# Altium PCB PCB1.PcbDoc (part 2 of 2)
Units mm, origin at the board's own origin, x right, y up, seen from the top; angles counter-clockwise.
Board outline 75.27 x 55.69 mm, 4 copper layers (Top Layer, Layer 1, Layer 2, Bottom Layer), stack 0.365 mm thick; 201 components, 124 nets, 644 pads, 413 vias.
Unrouted connection lines stored in the file: 108.
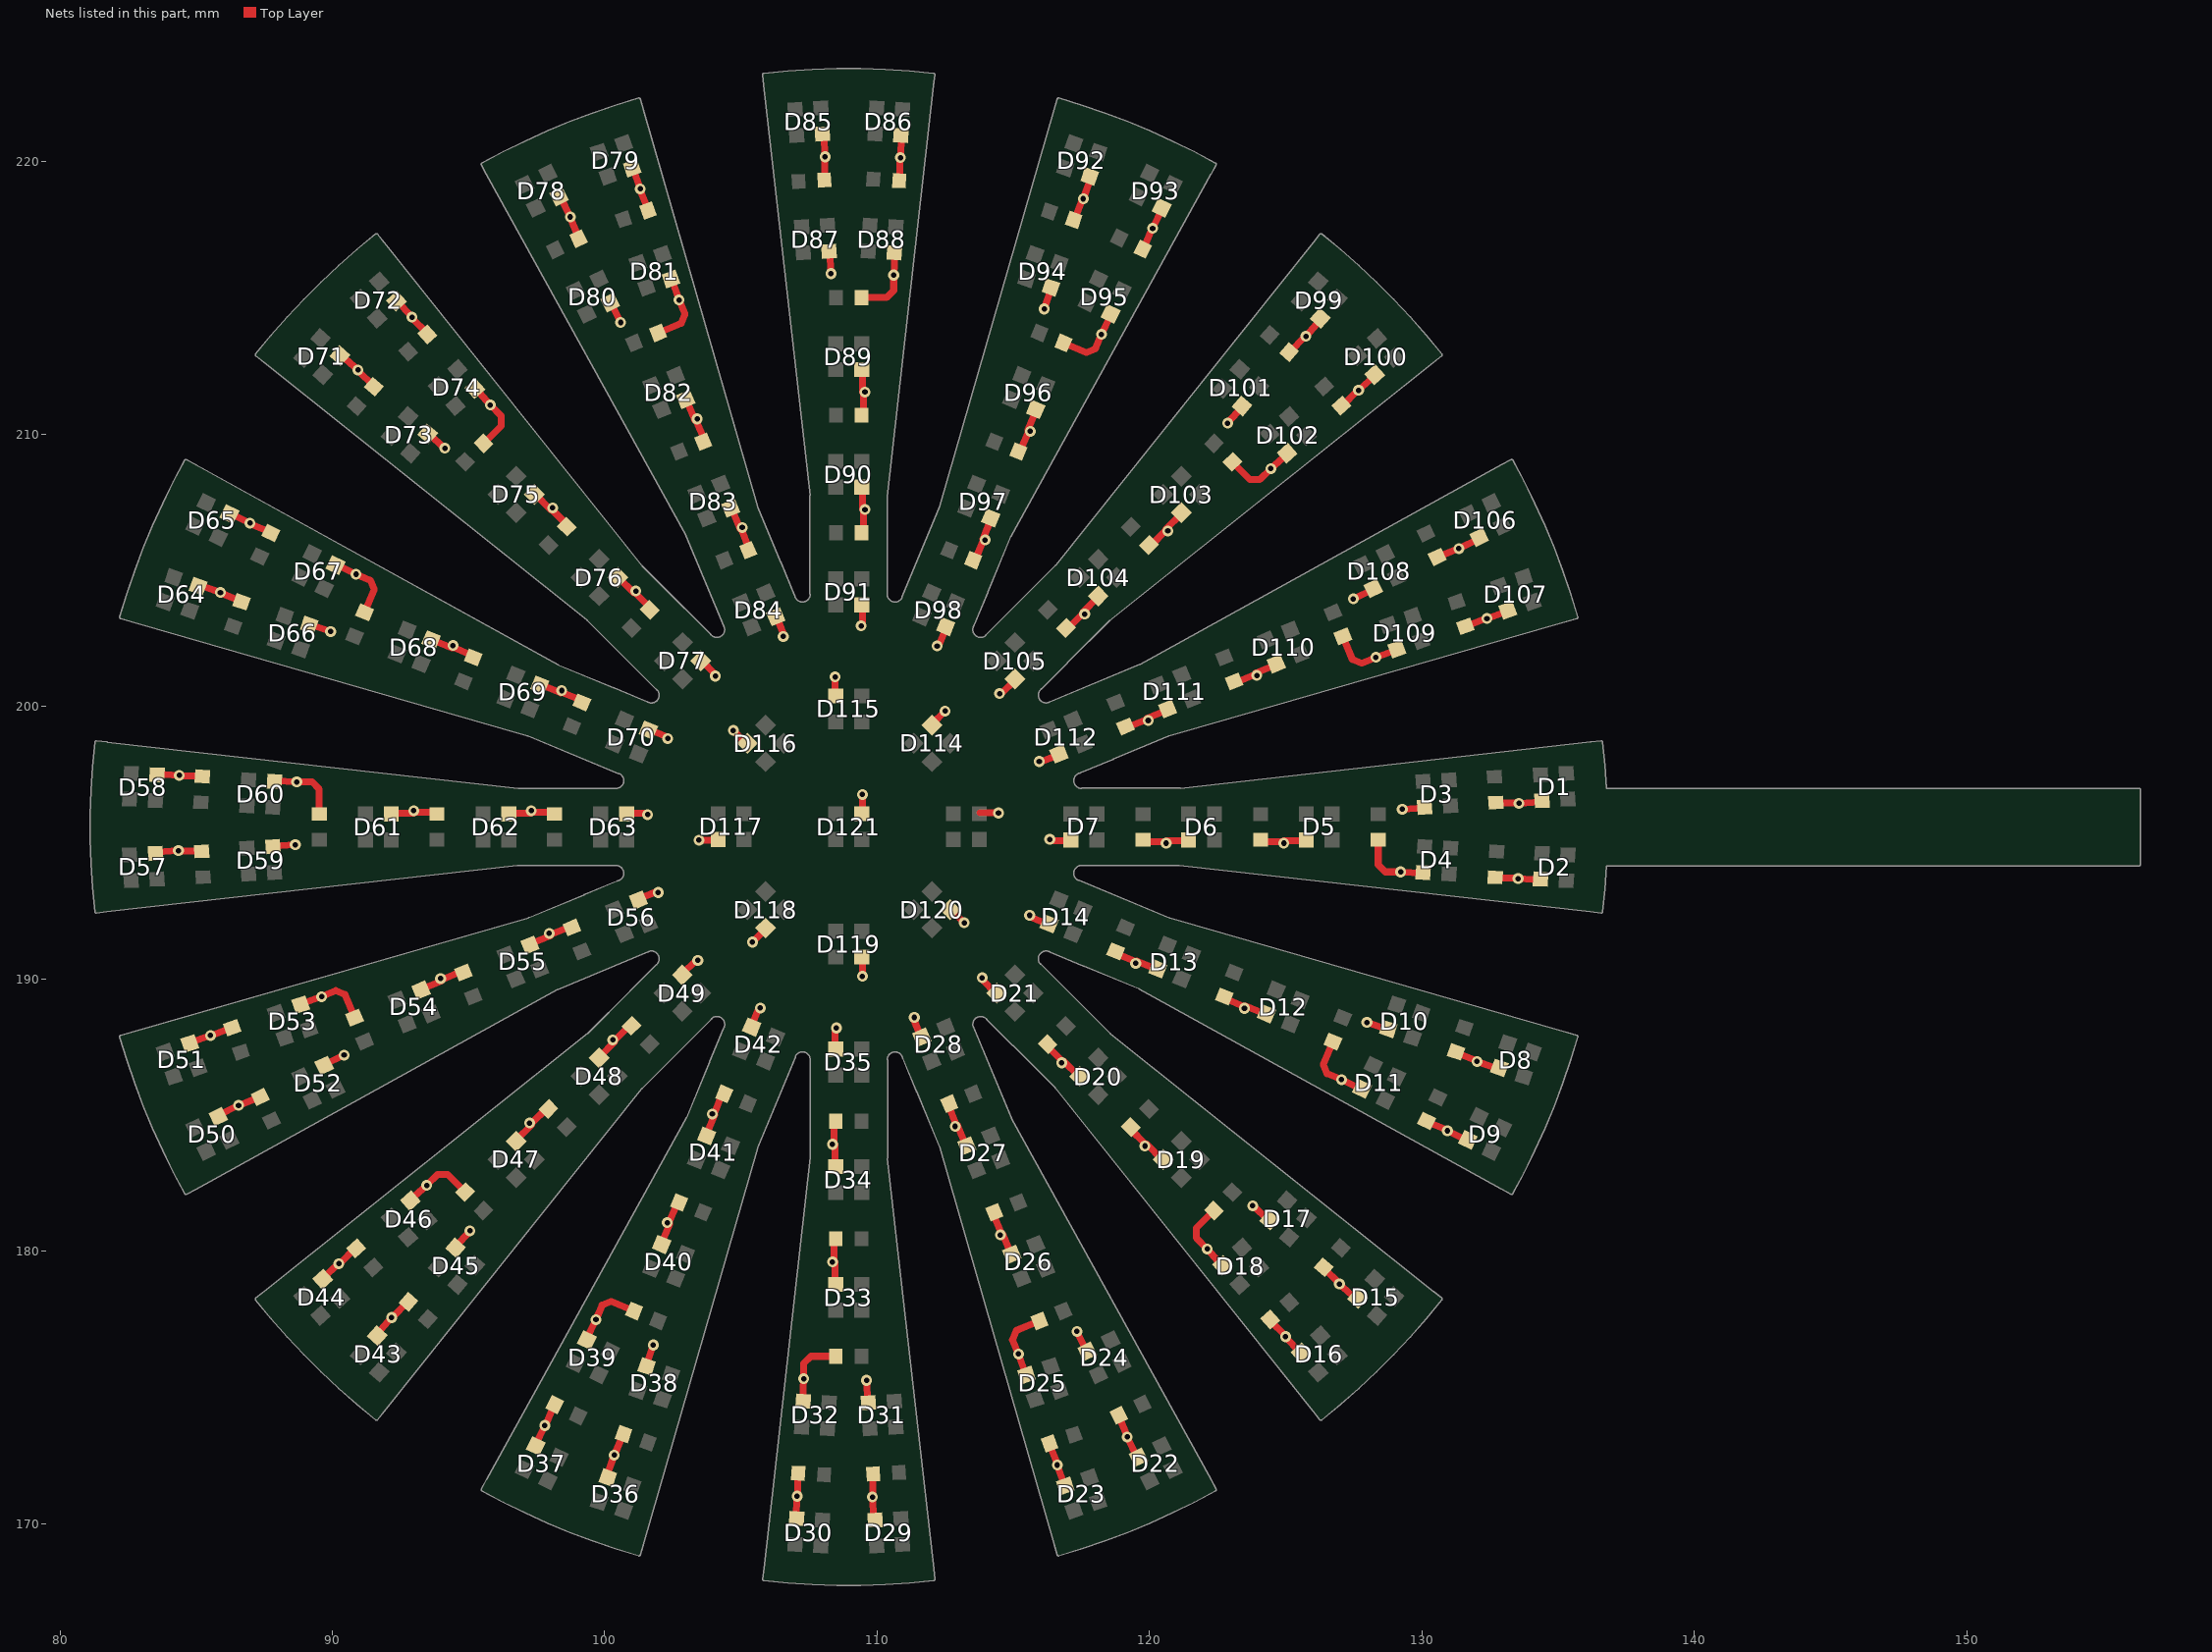
[diagram p4: the nets of this part, all layers, seen from the top]

## Via types
v1: diameter 0.4, hole 0.2, Top Layer to Bottom Layer, tented both sides, 413 vias

## Nets (pads, with @x,y where several pads share a name; then routed paths per layer and width w, separated by ;. In a path a pad name is that pad's centre, name@x,y a point inside that pad or via, vN(x,y) a via of type N, cw(c..) or ccw(c..) an arc to the next point about the centre after c; other vN are vias at no path point) (continued)
Vdd: C1.1 C2.1 C3.1 C4.1 C5.1 C6.1 C7.1 C8.1 C9.1 C10.1 C11.1 C12.1 C13.1 C14.1 C15.1 C16.1 C17.1 C18.1 C19.1 C20.1 C21.1 C22.1 C23.1 C24.1 C25.1 C26.1 C27.1 C28.1 C29.1 C30.1 C31.1 C32.1 C33.1 C34.1 C35.1 C36.1 C37.1 C38.1 C39.1 C40.1 C41.1 C42.1 C43.1 C44.1 C45.1 C46.1 C47.1 C48.1 C49.1 C50.1 C51.1 C52.1 C53.1 C54.1 C55.1 C56.1 C57.1 C58.1 C59.1 C60.1 C61.1 C62.1 C63.1 C64.1 C65.1 C66.1 C67.1 C68.1 C69.1 C70.1 C71.1 C72.1 C73.1 C74.1 C75.1 C76.1 C77.1 C78.1 C79.1 C80.1 D1.4 D2.4 D3.4 D4.4 D5.4 D6.4 D7.4 D8.4 D9.4 D10.4 D11.4 D12.4 D13.4 D14.4 D15.4 D16.4 D17.4 D18.4 D19.4 D20.4 D21.4 D22.4 D23.4 D24.4 D25.4 D26.4 D27.4 D28.4 D29.4 D30.4 D31.4 D32.4 D33.4 D34.4 D35.4 D36.4 D37.4 D38.4 D39.4 D40.4 D41.4 D42.4 D43.4 D44.4 D45.4 D46.4 D47.4 D48.4 D49.4 D50.4 D51.4 D52.4 D53.4 D54.4 D55.4 D56.4 D57.4 D58.4 D59.4 D60.4 D61.4 D62.4 D63.4 D64.4 D65.4 D66.4 D67.4 D68.4 D69.4 D70.4 D71.4 D72.4 D73.4 D74.4 D75.4 D76.4 D77.4 D78.4 D79.4 D80.4 D81.4 D82.4 D83.4 D84.4 D85.4 D86.4 D87.4 D88.4 D89.4 D90.4 D91.4 D92.4 D93.4 D94.4 D95.4 D96.4 D97.4 D98.4 D99.4 D100.4 D101.4 D102.4 D103.4 D104.4 D105.4 D106.4 D107.4 D108.4 D109.4 D110.4 D111.4 D112.4 D114.4 D115.4 D116.4 D117.4 D118.4 D119.4 D120.4 D121.4 | length 183
  Top Layer w0.254: D57.4@83.531,194.639 83.556,194.664 v1(84.352,194.71) 84.365,194.696 85.191,194.696 C45.1@85.203,194.684 ; D58.4@83.588,197.52 v1(84.383,197.475) 84.403,197.455 85.208,197.455 C44.1@85.23,197.433 ; D51.4@84.776,187.664 v1(85.528,187.927) 85.555,187.916 86.298,188.224 C39.1@86.326,188.212 ; D64.4@85.107,204.441 85.139,204.454 v1(85.892,204.192) 85.899,204.174 86.662,203.858 C50.1@86.668,203.842 ; D50.4@85.826,184.981 85.84,185.014 v1(86.557,185.36) 86.575,185.353 87.338,185.669 C40.1@87.354,185.662 ; D65.4@86.261,207.081 v1(86.979,206.735) 86.99,206.708 87.733,206.4 C49.1@87.745,206.372 ; D59.4@87.842,194.884 v1(88.638,194.929) v1@88.615,194.952 ; D60.4@87.899,197.275 v1(88.694,197.23) 89.264,197.23 89.521,196.973 C43.1@89.521,196.056 ; D53.4@88.853,189.088 v1(89.605,189.351) 90.131,189.569 90.467,189.429 C38.1@90.818,188.582 ; D66.4@89.183,203.017 v1(89.935,202.754) v1@89.923,202.784 ; D44.4@89.646,179.014 v1(90.24,179.544) 90.269,179.544 90.838,180.113 C34.1@90.869,180.113 ; D52.4@89.716,186.857 v1(90.433,187.203) v1@90.403,187.216 ; D67.4@90.151,205.205 v1(90.868,204.859) 91.394,204.641 91.533,204.305 C48.1@91.182,203.457 ; D71.4@90.313,212.893 90.348,212.893 v1(90.943,212.363) 90.943,212.343 91.527,211.76 C55.1@91.526,211.742 ; D43.4@91.643,176.936 91.643,176.972 v1(92.173,177.566) 92.193,177.566 92.776,178.15 C35.1@92.794,178.15 ; D61.4@92.189,196.081 v1@92.986,196.081 ; D72.4@92.39,214.89 v1(92.921,214.296) 92.921,214.267 93.49,213.698 C54.1@93.489,213.667 ; D46.4@92.867,181.889 v1(93.462,182.419) 93.864,182.822 94.228,182.822 C33.1@94.877,182.173 ; v1(92.986,196.175) 93.045,196.115 93.779,196.115 C42.1@93.839,196.056 ; D54.4@93.274,189.626 v1@94.01,189.931 ; D73.4@93.534,210.018 v1(94.129,209.487) v1@94.129,209.52 ; D68.4@93.657,202.459 v1@94.393,202.154 ; v1(93.974,190.018) 94.052,189.986 94.73,190.266 C37.1@94.807,190.234 ; v1(94.429,202.241) 94.461,202.163 95.139,201.882 C47.1@95.172,201.805 ; D45.4@94.518,180.158 v1(95.049,180.752) v1@95.016,180.752 ; D74.4@95.265,211.669 v1(95.796,211.074) 96.199,210.672 96.199,210.308 C53.1@95.55,209.659 ; D62.4@96.507,196.081 v1@97.304,196.081 ; D47.4@96.746,184.078 v1@97.309,184.641 ; v1(97.243,184.708) 97.327,184.708 97.846,185.227 C32.1@97.93,185.227 ; D55.4@97.263,191.278 v1@97.999,191.583 ; v1(97.304,196.175) 97.363,196.115 98.097,196.115 C41.1@98.157,196.056 ; D37.4@97.455,172.885 v1(97.801,173.603) 97.828,173.613 98.136,174.357 C29.1@98.164,174.368 ; D75.4@97.454,207.79 v1@98.018,207.227 ; D69.4@97.647,200.806 v1@98.383,200.502 ; v1(97.963,191.67) 98.041,191.638 98.719,191.919 C36.1@98.797,191.887 ; v1(98.084,207.293) 98.084,207.209 98.603,206.69 C52.1@98.603,206.606 ; D78.4@98.358,218.71 98.39,218.696 v1(98.737,217.978) 98.729,217.961 99.045,217.198 C60.1@99.038,217.182 ; v1(98.419,200.588) 98.451,200.511 99.129,200.23 C46.1@99.161,200.152 ; D39.4@99.331,176.774 v1(99.677,177.492) 99.895,178.018 100.231,178.157 C28.1@101.079,177.806 ; D48.4@99.799,187.131 v1@100.363,187.695 ; D36.4@100.095,171.73 100.082,171.763 v1(100.344,172.515) 100.362,172.522 100.678,173.285 C30.1@100.694,173.291 ; D80.4@100.234,214.82 v1(100.58,214.103) v1@100.592,214.133 ; v1(100.296,187.761) 100.38,187.761 100.899,188.28 C31.1@100.983,188.28 ; D76.4@100.508,204.737 v1@101.071,204.173 ; D63.4@100.949,196.132 100.825,196.081 v1@101.528,196.081 ; D79.4@101.041,219.76 v1(101.304,219.008) 101.293,218.981 101.601,218.238 C59.1@101.589,218.209 ; v1(101.137,204.24) 101.137,204.156 101.656,203.637 C51.1@101.656,203.553 ; D56.4@101.348,193.026 101.253,192.931 v1@101.902,193.2 ; D38.4@101.519,175.807 v1(101.782,176.559) v1@101.752,176.546 ; D70.4@101.77,199.154 101.636,199.154 v1@102.285,198.885 ; C58.1@101.958,213.718 102.806,214.069 102.945,214.405 v1(102.727,214.931) D81.4@102.464,215.683 ; D40.4@102.077,180.281 v1@102.382,181.017 ; v1(102.295,181.053) 102.373,181.085 102.654,181.763 C27.1@102.731,181.795 ; D49.4@102.904,190.309 102.853,190.184 v1@103.349,190.681 ; D82.4@103.002,211.262 v1@103.307,210.526 ; v1(103.394,210.562) 103.362,210.484 103.643,209.806 C57.1@103.611,209.728 ; v1(103.458,195.094) D117.4@104.138,195.094 ; D77.4@103.685,201.632 103.561,201.683 v1@104.058,201.186 ; D41.4@103.729,184.27 v1@104.034,185.006 ; v1(103.948,185.042) 104.025,185.074 104.306,185.752 C26.1@104.384,185.785 ; D83.4@104.655,207.273 v1@104.96,206.537 ; v1(104.715,199.128) D116.4@105.196,198.647 ; v1(105.047,206.573) 105.014,206.495 105.295,205.817 C56.1@105.263,205.739 ; D42.4@105.382,188.394 105.382,188.259 v1@105.651,188.909 ; v1(105.422,191.353) D118.4@105.903,191.834 ; D84.4@106.402,203.188 106.307,203.283 v1@106.576,202.634 ; D30.4@107.016,170.211 v1(107.061,171.007) 107.081,171.027 107.081,171.832 C24.1@107.103,171.853 ; D32.4@107.261,174.522 v1(107.306,175.318) 107.306,175.887 107.563,176.144 C23.1@108.48,176.144 ; D85.4@108.016,221.005 108.041,220.98 v1(108.086,220.184) 108.072,220.171 108.072,219.345 C64.1@108.06,219.333 ; D87.4@108.261,216.694 v1(108.306,215.898) v1@108.329,215.921 ; v1(108.361,179.61) 108.421,179.669 108.421,180.403 C22.1@108.48,180.462 ; v1(108.361,183.928) 108.421,183.987 108.421,184.721 C21.1@108.48,184.78 ; D35.4@108.404,187.573 108.455,187.449 v1@108.455,188.152 ; D33.4@108.455,178.813 v1@108.455,179.61 ; D34.4@108.455,183.131 v1@108.455,183.928 ; D115.4@108.456,200.412 v1(108.456,201.092) ; C61.1@109.432,206.379 109.492,206.439 109.492,207.173 v1(109.551,207.232) ; C62.1@109.432,210.697 109.492,210.757 109.492,211.491 v1(109.551,211.55) ; C63.1@109.432,215.015 110.35,215.015 110.607,215.272 v1(110.607,215.842) D88.4@110.652,216.637 ; v1(109.456,190.096) D119.4@109.456,190.776 ; D121.4@109.456,196.094 v1(109.456,196.774) ; v1@109.457,203.008 109.457,203.711 D91.4@109.508,203.587 ; v1@109.457,207.232 D90.4@109.457,208.029 ; v1@109.457,211.55 D89.4@109.457,212.347 ; v1@109.584,175.238 v1(109.607,175.261) D31.4@109.652,174.466 ; C25.1@109.852,171.826 109.84,171.814 109.84,170.989 v1(109.826,170.975) 109.871,170.18 D29.4@109.897,170.155 ; C65.1@110.809,219.306 110.831,219.328 110.831,220.133 v1(110.852,220.153) D86.4@110.897,220.948 ; v1@111.336,188.525 111.605,187.876 D28.4@111.51,187.971 ; D114.4@112.01,199.354 v1(112.49,199.835) ; v1@112.262,202.251 112.53,202.9 D98.4@112.53,202.766 ; C16.1@112.649,185.42 112.617,185.343 112.898,184.665 v1(112.866,184.587) ; D120.4@112.717,192.541 v1(113.197,192.06) ; v1@112.953,184.623 D27.4@113.257,183.887 ; C66.1@113.529,205.375 113.606,205.407 113.887,206.085 v1(113.965,206.117) ; 113.774,196.094 v1(114.454,196.094) ; v1@113.855,189.973 114.352,189.476 D21.4@114.227,189.528 ; v1@113.878,206.153 D97.4@114.183,206.889 ; C17.1@114.302,181.431 114.27,181.353 114.55,180.675 v1(114.518,180.598) ; v1@114.563,200.478 115.06,200.975 D105.4@115.008,200.851 ; v1@114.605,180.634 D26.4@114.91,179.897 ; C67.1@115.181,209.364 115.259,209.397 115.54,210.075 v1(115.617,210.107) ; D25.4@115.448,175.476 v1(115.185,176.229) 114.967,176.755 115.106,177.091 C18.1@115.954,177.442 ; v1@115.53,210.143 D96.4@115.835,210.879 ; v1@115.627,192.274 D14.4@116.277,192.005 ; v1@116.011,197.96 116.66,198.229 D112.4@116.565,198.134 ; v1@116.161,214.613 v1(116.131,214.601) D94.4@116.394,215.353 ; C11.1@116.256,187.607 116.256,187.523 116.775,187.004 v1(116.775,186.92) ; C19.1@116.324,172.95 116.312,172.922 116.62,172.178 v1(116.609,172.152) D23.4@116.872,171.4 ; v1@116.384,195.079 117.087,195.079 D7.4@116.963,195.027 ; C68.1@116.833,213.354 117.681,213.002 118.017,213.142 v1(118.235,213.668) D95.4@118.581,214.385 ; v1@116.841,186.986 D20.4@117.405,186.423 ; C71.1@116.929,202.88 117.013,202.88 117.532,203.399 v1(117.616,203.399) ; C69.1@117.218,217.868 117.234,217.874 117.55,218.637 v1(117.568,218.644) 117.831,219.397 D92.4@117.817,219.429 ; v1@117.32,177.027 v1(117.333,177.057) D24.4@117.679,176.339 ; v1@117.55,203.465 D104.4@118.113,204.028 ; C6.1@118.751,191.007 118.784,190.93 119.462,190.649 v1(119.494,190.571) ; C20.1@118.874,173.977 118.867,173.961 119.183,173.199 v1(119.176,173.181) 119.522,172.463 D22.4@119.555,172.45 ; C76.1@119.116,199.273 119.193,199.241 119.871,199.522 v1(119.949,199.489) ; C12.1@119.309,184.554 119.309,184.47 119.828,183.951 v1(119.828,183.866) ; v1@119.53,190.658 D13.4@120.266,190.353 ; C70.1@119.748,216.791 119.777,216.803 120.084,217.546 v1(120.111,217.557) D93.4@120.457,218.275 ; C1.1@119.756,195.104 119.815,195.044 120.549,195.044 v1(120.608,194.985) ; v1@119.895,183.933 D19.4@120.458,183.37 ; v1@119.913,199.576 D111.4@120.649,199.881 ; C72.1@119.982,205.933 120.066,205.933 120.585,206.452 v1(120.669,206.452) ; v1@120.603,206.518 D103.4@121.166,207.082 ; v1@120.608,195.079 D6.4@121.405,195.079 ; C13.1@122.363,181.5 121.714,180.852 121.714,180.488 v1(122.116,180.085) D18.4@122.647,179.491 ; C7.1@122.741,189.355 122.773,189.277 123.451,188.996 v1(123.483,188.919) ; v1@122.896,210.407 v1(122.864,210.407) D101.4@123.394,211.002 ; C73.1@123.036,208.986 123.684,208.337 124.048,208.337 v1(124.451,208.74) D102.4@125.045,209.271 ; C77.1@123.105,200.925 123.183,200.893 123.861,201.174 v1(123.938,201.142) ; v1@123.519,189.006 D12.4@124.255,188.701 ; v1@123.784,181.64 v1(123.784,181.672) D17.4@124.378,181.142 ; v1@123.902,201.229 D110.4@124.638,201.533 ; C2.1@124.074,195.104 124.133,195.044 124.867,195.044 v1(124.926,194.985) ; C14.1@124.423,177.492 124.423,177.461 124.992,176.892 v1(124.992,176.864) D16.4@125.522,176.269 ; v1@124.926,195.079 D5.4@125.723,195.079 ; C74.1@125.119,213.01 125.136,213.009 125.72,213.593 v1(125.739,213.593) 126.27,214.187 D99.4@126.27,214.223 ; C15.1@126.386,179.417 126.386,179.4 126.97,178.816 v1(126.97,178.797) 127.564,178.266 D15.4@127.599,178.266 ; C8.1@126.73,187.703 126.379,186.855 126.518,186.519 v1(127.044,186.301) D11.4@127.762,185.955 ; C75.1@127.044,211.047 127.075,211.046 127.644,211.615 v1(127.672,211.615) D100.4@128.267,212.146 ; C78.1@127.094,202.578 127.445,201.73 127.781,201.591 v1(128.307,201.809) D109.4@129.06,202.071 ; v1@127.509,203.944 v1(127.479,203.956) D108.4@128.197,204.302 ; v1@127.989,188.375 v1(127.977,188.405) D10.4@128.729,188.142 ; C3.1@128.392,195.104 128.392,194.186 128.649,193.929 v1(129.218,193.929) D4.4@130.014,193.884 ; v1@129.298,196.207 v1(129.275,196.23) D3.4@130.07,196.275 ; C10.1@130.168,184.788 130.179,184.759 130.922,184.451 v1(130.933,184.425) D9.4@131.651,184.079 ; C79.1@130.559,205.498 130.575,205.491 131.337,205.807 v1(131.355,205.799) 132.072,206.146 D106.4@132.086,206.178 ; C9.1@131.245,187.318 131.251,187.302 132.014,186.986 v1(132.021,186.968) 132.773,186.705 D8.4@132.806,186.719 ; C80.1@131.586,202.947 131.614,202.935 132.358,203.243 v1(132.384,203.232) D107.4@133.136,203.495 ; C5.1@132.683,193.727 132.704,193.705 133.509,193.705 v1(133.529,193.684) D2.4@134.325,193.639 ; C4.1@132.71,196.476 132.722,196.463 133.547,196.463 v1(133.561,196.45) 134.356,196.495 D1.4@134.381,196.52
  other v1: 108.502,188.199 111.362,188.587 105.712,188.934 123.478,188.92 113.855,190.04 119.488,190.572 103.416,190.681 115.596,192.337 115.602,192.336 101.963,193.174 116.337,195.126 101.575,196.034 115.949,197.985 102.31,198.824 114.496,200.478 104.058,201.12 112.2,202.225 106.551,202.573 109.41,202.961
pads on no net: D122.4
copper on no net: | length 639.9
  Top Layer w0.254: v1(81.794,197.622) 82.589,197.577 ; 82.533,194.583 82.496,195.231 82.823,195.597 83.06,195.583 83.5,195.976 83.531,196.522 ; v1(83.08,187.072) 83.832,187.335 ; 84.162,204.77 84.377,205.383 84.818,205.597 85.033,205.493 85.589,205.688 85.827,206.18 ; v1(84.643,207.861) 85.361,207.515 ; 84.926,184.547 84.644,185.132 84.805,185.595 85.03,185.673 85.286,186.204 85.106,186.72 ; v1(86.105,197.377) 86.9,197.332 86.695,197.127 ; 86.844,194.827 86.812,195.38 87.016,195.609 87.318,195.626 87.618,195.609 87.814,195.784 87.842,196.277 ; v1(87.157,188.496) 87.909,188.758 87.797,188.49 ; 87.899,193.886 v1(88.694,193.931) ; 88.239,203.347 88.422,203.869 88.698,204.003 88.983,203.903 89.253,203.773 89.502,203.859 89.716,204.304 ; v1(88.305,177.817) 88.9,178.348 ; v1(88.532,205.985) 89.25,205.639 88.981,205.528 ; 88.815,186.423 88.574,186.921 88.675,187.211 88.947,187.342 89.231,187.441 89.345,187.678 89.182,188.144 ; 88.853,202.073 v1(89.606,201.81) ; 89.567,213.559 89.999,214.043 90.489,214.071 90.648,213.894 91.236,213.86 91.644,214.224 ; 90.15,185.956 v1(90.868,186.303) ; 90.312,178.268 90.676,177.86 90.642,177.271 90.465,177.113 90.493,176.623 90.977,176.19 ; v1(90.393,196.081) 91.189,196.081 ; v1(91.194,216.231) 91.724,215.636 ; v1(91.527,180.693) 92.121,181.223 92.121,180.932 ; v1(91.614,188.938) 92.35,189.243 ; v1(91.997,203.146) 92.733,202.842 ; 92.189,195.081 v1(92.986,195.081) ; 92.389,176.271 v1(92.919,176.865) ; 92.788,210.684 93.157,211.097 93.463,211.114 93.688,210.913 93.888,210.689 94.151,210.674 94.519,211.003 ; 92.869,209.272 v1(93.463,208.741) ; 93.275,201.535 v1(94.011,201.23) ; 93.533,181.143 93.862,180.775 93.847,180.512 93.623,180.312 93.422,180.087 93.439,179.781 93.852,179.412 ; 93.657,188.702 v1(94.393,189.007) ; v1(94.069,213.009) 94.6,212.415 94.309,212.415 ; v1(94.711,196.175) 94.758,196.128 95.46,196.128 95.507,196.081 ; 95.264,179.492 v1(95.795,180.086) ; v1(95.567,190.678) 95.629,190.652 96.278,190.921 96.339,190.896 ; v1(96.023,201.581) 96.048,201.519 96.697,201.251 96.723,201.189 ; v1(96.184,209.06) 96.747,208.497 ; 96.507,195.081 97.304,195.081 97.325,195.03 v1(97.304,194.979) ; v1(96.675,171.267) 97.021,171.984 ; 96.747,207.083 v1(97.311,206.519) ; 97.264,199.883 98,199.578 98,199.523 v1(97.961,199.484) ; 97.453,183.371 v1(98.016,183.934) ; 97.646,190.355 98.382,190.659 98.421,190.621 v1(98.421,190.566) ; 97.923,219.61 98.508,219.892 98.971,219.731 99.05,219.506 99.581,219.25 100.097,219.43 ; 98.356,172.451 98.848,172.213 99.043,171.656 98.939,171.442 99.153,171 99.766,170.786 ; v1(98.462,185.927) 98.529,185.927 99.026,186.424 99.092,186.424 ; v1(98.551,175.156) 98.897,175.873 99.008,175.605 ; v1(99.304,206.074) 99.304,206.007 99.801,205.51 99.801,205.444 ; 99.333,214.386 v1(99.679,213.668) ; 99.799,215.721 100.298,215.962 100.587,215.861 100.718,215.589 100.817,215.305 101.054,215.191 101.52,215.353 ; 99.801,204.03 100.364,203.466 100.343,203.416 v1(100.292,203.395) ; 100.232,176.34 100.677,176.125 100.763,175.877 100.633,175.606 100.533,175.321 100.667,175.045 101.189,174.863 ; v1(100.449,221.456) 100.711,220.704 ; 100.825,195.081 v1(101.193,194.192) ; v1(101.253,197.268) 101.253,198.23 ; v1(101.389,178.621) 101.694,179.357 ; v1(101.546,188.955) v1@101.632,188.991 ; v1@101.598,188.965 102.095,189.461 ; 101.635,192.007 v1(102.316,191.327) ; 101.866,216.739 102.135,216.627 v1(101.872,217.379) ; 102.07,189.298 102.143,189.475 ; 102.079,210.879 v1(102.383,210.143) ; v1(102.315,212.922) 102.62,212.186 ; 102.463,175.477 v1(102.726,176.229) ; v1(102.486,200.087) 102.854,200.976 ; v1(102.955,182.646) 103.016,182.672 103.285,183.321 103.347,183.346 ; 103.001,179.898 v1(103.306,180.634) ; 103.56,189.477 v1(104.449,189.109) ; 103.731,206.89 104.036,206.154 103.997,206.115 v1(103.942,206.115) ; v1(104.054,208.969) 104.029,208.907 104.298,208.258 104.272,208.197 ; v1(104.645,186.623) v1@104.712,186.689 ; 104.653,183.887 104.958,184.623 105.013,184.623 v1(105.052,184.585) ; v1@104.69,186.652 104.959,187.301 ; v1(104.703,202.22) 105.383,202.901 ; 104.998,187.141 104.998,187.332 ; 106.306,187.877 v1(107.268,187.877) ; v1(106.914,168.417) 106.959,169.213 ; v1(107.159,172.729) 107.204,173.524 107.409,173.318 ; 107.262,216.637 v1(107.307,215.842) ; v1(107.568,203.342) 108.457,203.711 ; 107.959,222.003 108.607,222.04 108.973,221.713 108.96,221.476 109.353,221.036 109.898,221.005 ; 108.014,170.155 108.56,170.124 108.952,169.684 108.939,169.446 109.305,169.119 109.953,169.156 ; 108.204,217.692 108.757,217.724 108.985,217.52 109.002,217.218 108.985,216.918 109.161,216.722 109.653,216.694 ; 108.259,174.466 108.752,174.438 108.927,174.241 108.91,173.941 108.927,173.64 109.156,173.436 109.709,173.467 ; v1(108.356,207.232) 108.406,207.211 108.457,207.232 108.457,208.029 ; v1(108.361,181.334) 108.408,181.381 108.408,182.084 108.455,182.131 ; v1(108.401,185.655) v1@108.437,185.742 ; v1@108.431,185.699 108.431,186.402 ; v1(108.455,177.016) 108.455,177.813 ; 108.455,186.445 108.529,186.268 ; v1(108.457,211.55) 108.457,212.347 ; 109.455,178.813 v1(109.455,179.61) ; 109.455,183.131 109.455,183.928 109.506,183.948 v1(109.557,183.928) ; 109.455,187.449 v1(110.344,187.817) ; 109.457,209.029 109.504,209.076 109.504,209.778 v1(109.551,209.825) ; 109.457,213.347 v1(109.457,214.143) ; 110.503,217.841 110.709,217.636 v1(110.754,218.431) ; v1(110.605,175.318) 110.65,174.522 ; v1(110.644,203.283) 111.607,203.283 ; v1(110.85,171.007) 110.895,170.211 ; 110.953,221.947 v1(110.999,222.742) ; 112.529,188.259 v1(113.209,188.939) ; v1(112.861,206.575) 112.899,206.536 112.954,206.536 113.259,207.272 ; v1(113.464,202.05) 114.353,201.682 ; 113.64,182.963 113.615,182.901 113.884,182.252 v1(113.858,182.191) ; v1(113.97,185.044) 113.915,185.044 113.876,185.006 114.181,184.269 ; 114.566,207.813 114.627,207.839 114.896,208.488 v1(114.957,208.513) ; v1(114.607,210.525) 114.911,211.261 ; v1(115.187,214.93) 115.449,215.683 ; 115.293,178.974 v1(115.597,178.238) ; v1(115.529,181.016) 115.834,180.28 ; v1(115.597,199.833) 116.277,199.153 ; v1(116.04,173.78) 115.778,174.532 116.046,174.421 ; 116.218,211.803 v1(116.523,212.539) ; 116.392,175.806 116.858,175.969 117.095,175.854 117.194,175.571 117.325,175.299 117.615,175.198 118.113,175.438 ; 116.723,216.297 117.246,216.114 117.379,215.838 117.279,215.553 117.149,215.283 117.236,215.034 117.68,214.82 ; v1(116.771,204.244) 116.792,204.193 116.843,204.172 117.406,204.735 ; 117.201,170.456 v1(117.464,169.704) ; 117.816,171.729 118.332,171.91 118.863,171.654 118.941,171.429 119.404,171.267 119.989,171.549 ; 118.091,195.079 118.268,195.152 ; 118.147,220.374 118.76,220.159 118.973,219.718 118.87,219.503 119.064,218.947 119.556,218.709 ; v1(118.233,177.491) 118.58,176.774 ; 118.82,204.735 118.887,204.735 119.384,205.232 v1(119.45,205.232) ; 118.904,215.555 119.016,215.286 v1(119.362,216.004) ; v1(119.492,200.594) 119.492,200.539 119.53,200.5 120.266,200.805 ; v1(119.896,207.225) 120.459,207.789 ; v1(119.951,191.675) 119.912,191.637 119.912,191.582 120.649,191.277 ; 120.892,219.175 v1(121.238,219.893) ; 121.19,189.97 121.215,189.909 121.864,189.64 v1(121.89,189.579) ; 121.573,200.264 121.634,200.238 122.284,200.507 v1(122.345,200.482) ; 121.873,207.789 v1(122.437,208.352) ; v1(122.118,211.073) 122.648,211.667 ; v1(123.52,202.152) 124.256,202.457 ; v1(123.902,189.929) 124.638,189.625 ; 124.06,211.748 124.473,211.379 124.491,211.073 124.289,210.848 124.065,210.648 124.05,210.385 124.379,210.017 ; 125.179,188.318 v1(125.915,188.013) ; 125.562,201.916 v1(126.298,202.221) ; 125.791,210.227 125.791,209.936 v1(126.385,210.467) ; 126.935,214.969 127.42,214.537 127.448,214.047 127.27,213.888 127.237,213.3 127.601,212.892 ; v1(127.045,204.857) 127.762,205.203 ; 128.196,186.856 128.411,187.3 128.659,187.387 128.93,187.256 129.215,187.157 129.491,187.29 129.673,187.813 ; v1(128.307,189.349) 129.059,189.087 ; 128.73,203.016 128.567,203.482 128.682,203.719 128.965,203.818 129.237,203.949 129.338,204.238 129.098,204.737 ; 128.931,185.632 128.662,185.52 v1(129.38,185.174) ; 129.013,212.812 v1(129.607,213.342) ; 130.115,202.67 130.004,202.401 v1(130.756,202.664) ; 132.085,184.98 132.323,185.472 132.88,185.666 133.094,185.563 133.536,185.776 133.75,186.389 ; 132.552,183.644 v1(133.269,183.298) ; 132.806,204.439 132.626,204.955 132.882,205.486 133.107,205.565 133.269,206.028 132.987,206.613 ; 134.08,203.825 v1(134.832,204.087)
  Layer 2 w0.2: v1@92.906,176.884 92.906,179.632 95.093,181.819 95.62,182.345 96.147,182.872 97.816,184.541 99.459,186.184 101.102,187.828 103.246,189.971 103.846,189.971 ; 109.318,188.004 108.894,187.58 108.894,184.549 108.894,182.225 108.894,179.901 108.894,177.54 108.894,176.796 108.894,176.051 108.894,172.958 v1@110.837,171.015 ; 116.107,193.024 116.336,192.47 119.137,191.31 121.284,190.421 123.431,189.531 125.612,188.628 126.3,188.343 126.988,188.058 129.846,186.874 132.384,187.925
  Layer 2 w0.254: 103.846,189.971 104.857,189.552 105.347,188.369 v1@104.632,186.643 ; 109.318,188.004 110.33,188.423 111.513,187.933 112.228,186.207
  Bottom Layer w0.254: v1(81.794,197.622) 83.255,197.622 86.946,193.931 v1(88.694,193.931) ; v1(83.08,187.072) 84.43,187.631 89.253,185.634 v1(90.868,186.303) ; v1(84.643,207.861) 85.993,207.302 87.991,202.479 v1(89.606,201.81) ; v1(86.105,197.377) 87.312,197.377 90.156,194.534 91.269,194.534 91.816,195.081 v1(92.986,195.081) ; v1(87.157,188.496) 88.272,188.958 91.987,187.419 93.016,187.845 93.312,188.559 v1(94.393,189.007) ; v1(88.305,177.817) 89.339,178.851 94.559,178.851 v1(95.795,180.086) ; v1(88.532,205.985) 89.647,205.523 91.186,201.808 92.215,201.382 92.93,201.678 v1(94.011,201.23) ; v1(90.393,196.081) 90.45,196.081 90.903,195.628 93.263,195.628 95.587,195.628 96.134,195.081 97.304,195.081 97.325,195.03 v1(97.304,194.979) ; v1(91.194,216.231) 92.227,215.197 92.227,209.977 v1(93.463,208.741) ; v1(91.527,180.693) 92.38,181.546 96.402,181.546 97.189,182.333 97.189,183.107 v1(98.016,183.934) ; v1(91.614,188.938) 91.667,188.96 92.259,188.715 94.439,189.618 96.586,190.508 97.301,190.212 98.382,190.659 98.421,190.621 v1(98.421,190.566) ; v1(91.997,203.146) 92.05,203.125 92.295,202.533 94.476,201.629 96.623,200.74 96.919,200.025 98,199.578 98,199.523 v1(97.961,199.484) ; v1(94.069,213.009) 94.922,212.156 94.922,208.134 95.71,207.347 96.483,207.347 v1(97.311,206.519) ; v1(94.711,196.175) 96.53,196.175 97.179,195.526 99.048,195.526 99.524,195.526 100.872,194.968 v1(101.193,194.192) ; v1(95.567,190.678) 97.249,191.374 98.096,191.023 99.823,191.739 100.262,191.921 101.721,191.921 v1(102.316,191.327) ; v1(96.023,201.581) 97.704,200.884 98.055,200.038 99.782,199.322 100.221,199.14 101.253,198.108 v1(101.253,197.268) ; v1(96.184,209.06) 96.224,209.02 96.224,208.379 97.893,206.71 99.537,205.067 99.537,204.293 100.364,203.466 100.343,203.416 v1(100.292,203.395) ; v1(96.675,171.267) 97.234,172.617 102.057,174.614 v1(102.726,176.229) ; v1(98.462,185.927) 99.749,187.214 100.666,187.214 101.988,188.536 102.324,188.872 103.672,189.431 v1(104.449,189.109) ; v1(98.551,175.156) 99.013,176.271 102.728,177.81 103.154,178.839 102.858,179.553 v1(103.306,180.634) ; v1(99.304,206.074) 100.59,204.787 100.59,203.87 101.912,202.548 102.249,202.212 102.807,200.864 v1(102.486,200.087) ; v1(99.679,213.668) 99.01,215.283 101.008,220.106 v1(100.449,221.456) ; v1(101.389,178.621) 101.411,178.674 102.003,178.919 102.907,181.1 103.796,183.247 104.511,183.543 104.958,184.623 105.013,184.623 v1(105.052,184.585) ; v1(101.546,188.955) v1@101.673,188.955 ; v1(101.872,217.379) 102.334,216.264 100.795,212.549 101.221,211.52 101.936,211.224 v1(102.383,210.143) ; v1(102.315,212.922) 102.337,212.869 102.092,212.277 102.995,210.097 103.884,207.95 103.588,207.235 104.036,206.154 103.997,206.115 v1(103.942,206.115) ; v1(102.955,182.646) 103.651,184.327 104.498,184.678 105.214,186.405 105.396,186.845 106.428,187.877 v1(107.268,187.877) ; v1(104.054,208.969) 104.751,207.287 104.4,206.44 105.115,204.713 105.297,204.274 105.297,202.815 v1(104.703,202.22) ; v1(104.645,186.623) v1@104.762,186.672 ; v1(106.914,168.417) 106.914,169.879 110.605,173.57 v1(110.605,175.318) ; v1(107.159,172.729) 107.159,173.936 110.002,176.779 110.002,177.893 109.455,178.44 v1(109.455,179.61) ; v1(107.307,215.842) 107.307,217.59 110.999,221.281 v1(110.999,222.742) ; v1(107.568,203.342) 108.344,203.664 108.903,205.012 108.903,205.488 108.903,207.357 109.551,208.006 v1(109.551,209.825) ; v1(108.356,207.232) 108.406,207.211 108.457,207.232 108.457,208.402 109.004,208.949 109.004,211.273 109.004,213.633 109.457,214.086 v1(109.457,214.143) ; v1(108.361,181.334) 108.361,183.154 109.01,183.802 109.01,185.671 109.01,186.147 109.568,187.496 v1(110.344,187.817) ; v1(108.401,185.655) v1@108.491,185.745 ; v1(108.455,177.016) 108.455,177.073 108.908,177.526 108.908,179.887 108.908,182.211 109.455,182.758 109.455,183.928 109.506,183.948 v1(109.557,183.928) ; v1(108.457,211.55) 108.457,212.72 107.91,213.267 107.91,214.38 110.754,217.224 v1(110.754,218.431) ; v1(110.644,203.283) 111.485,203.283 112.517,204.315 112.699,204.754 113.414,206.481 114.261,206.832 v1(114.957,208.513) ; v1(112.861,206.575) 112.899,206.536 112.954,206.536 113.402,207.617 114.117,207.913 115.006,210.06 115.909,212.241 116.501,212.486 v1(116.523,212.539) ; v1(113.209,188.939) 112.615,188.345 112.615,186.886 112.797,186.446 113.513,184.719 113.162,183.872 v1(113.858,182.191) ; v1(113.464,202.05) 114.24,201.729 115.588,202.287 115.925,202.624 117.246,203.946 118.163,203.946 v1(119.45,205.232) ; v1(113.97,185.044) 113.915,185.044 113.876,185.006 114.324,183.925 114.028,183.21 114.917,181.063 115.821,178.882 115.576,178.29 v1(115.597,178.238) ; v1(114.607,210.525) 115.054,211.606 114.758,212.321 115.184,213.349 118.9,214.889 v1(119.362,216.004) ; v1(115.187,214.93) 115.856,216.545 120.678,218.543 v1(121.238,219.893) ; v1(115.529,181.016) 115.977,179.935 116.691,179.639 117.117,178.611 115.578,174.895 v1(116.04,173.78) ; v1(115.597,199.833) 116.191,199.239 117.65,199.239 118.09,199.421 119.817,200.136 120.664,199.785 v1(122.345,200.482) ; v1(116.771,204.244) 116.792,204.193 116.843,204.172 117.67,204.999 118.443,204.999 120.087,206.643 121.756,208.312 122.396,208.312 v1(122.437,208.352) ; v1(117.464,169.704) 116.905,171.054 118.902,175.876 v1(118.233,177.491) ; v1(119.492,200.594) 119.492,200.539 119.53,200.5 120.611,200.948 121.326,200.652 123.473,201.541 125.654,202.444 126.246,202.199 v1(126.298,202.221) ; v1(119.896,207.225) 120.723,208.053 120.723,208.826 121.51,209.613 125.532,209.613 v1(126.385,210.467) ; v1@119.912,191.582 119.912,191.637 v1(119.951,191.675) ; v1(122.118,211.073) 123.354,212.309 128.574,212.309 v1(129.607,213.342) ; v1(123.52,202.152) 124.601,202.6 124.897,203.315 125.925,203.741 129.641,202.202 v1(130.756,202.664) ; v1@125.862,188.035 v1(125.915,188.013) ; v1(127.045,204.857) 128.66,205.526 133.482,203.528 v1(134.832,204.087) ; v1(128.307,189.349) 129.922,188.68 131.919,183.858 v1(133.269,183.298)

## Polygon pours and split planes (outlines as drawn)
GND on Layer 1 "NONET_L-01_P-001" (solid, remove dead copper, pour order 3): 81.106,167.729 156.591,167.729 156.591,223.774 81.106,223.774
Vdd on Layer 2 "NONET_L-01_P-001" (solid, remove dead copper, pour order 2): 81.106,167.729 156.591,167.729 156.591,223.774 81.106,223.774
Vdd on Bottom Layer "NONET_L-01_P-001" (solid, remove dead copper, pour order 1): 81.106,167.729 156.591,167.729 156.591,223.774 81.106,223.774
GND on Top Layer "NONET_L-01_P-001" (solid, remove dead copper, pour order 0): 81.106,167.729 156.591,167.729 156.591,223.774 81.106,223.774

## Keep-outs
Keep-Out Layer:
  lines w0.01: 156.324,194.151 136.77,194.151 136.759,193.94 136.731,193.517 136.697,193.095 136.656,192.674 136.631,192.458 136.622,192.438 136.605,192.424 136.589,192.419 136.576,192.419 136.174,192.464 121.097,194.162 121.084,194.166 117.589,194.164 117.572,194.16 117.551,194.162 117.538,194.164 117.524,194.166 117.503,194.166 117.455,194.162 117.364,194.131 117.289,194.071 117.238,193.99 117.217,193.896 117.227,193.801 117.269,193.715 117.337,193.647 117.39,193.624 117.41,193.62 120.734,192.244 120.749,192.235 135.32,188.035 135.691,187.929 135.704,187.919 135.714,187.906 135.72,187.882 135.718,187.868 135.501,187.118 134.986,185.644 134.388,184.2 133.71,182.793 133.329,182.104 133.308,182.087 133.295,182.084 133.279,182.084 133.264,182.09 132.909,182.286 119.62,189.633 117.583,190.472 117.566,190.476 116.368,190.973 116.355,190.981 116.331,190.994 116.31,191.004 116.265,191.018 116.169,191.023 116.077,190.997 115.999,190.941 115.944,190.863 115.917,190.771 115.922,190.676 115.959,190.587 116,190.546 116.017,190.534 118.561,187.991 118.571,187.977 130.426,178.521 130.733,178.273 130.741,178.251 130.739,178.233 130.73,178.214 130.243,177.604 129.202,176.439 128.097,175.334 126.933,174.294 126.314,173.8 126.295,173.795 126.275,173.797 126.251,173.815 125.999,174.132 116.54,185.991 116.532,186.005 114.971,187.56 114.957,187.57 114.041,188.487 114.031,188.5 114.014,188.522 114,188.538 113.963,188.569 113.876,188.61 113.781,188.621 113.688,188.599 113.607,188.548 113.547,188.474 113.515,188.383 113.515,188.287 113.537,188.234 113.549,188.216 114.926,184.891 114.929,184.876 122.264,171.603 122.446,171.272 122.452,171.257 122.453,171.241 122.442,171.216 122.427,171.204 121.743,170.826 120.336,170.148 118.893,169.551 117.418,169.035 116.658,168.816 116.638,168.818 116.621,168.828 116.605,168.853 116.494,169.243 112.293,183.821 112.291,183.835 111.444,185.868 111.435,185.883 110.939,187.084 110.936,187.097 110.932,187.11 110.928,187.123 110.921,187.144 110.899,187.187 110.835,187.258 110.751,187.304 110.656,187.32 110.562,187.304 110.478,187.258 110.414,187.186 110.378,187.098 110.377,187.04 110.381,187.02 110.381,183.42 110.378,183.405 112.075,168.336 112.118,167.958 112.118,167.945 112.111,167.928 112.099,167.914 112.073,167.904 111.297,167.817 109.737,167.729 108.175,167.729 106.616,167.817 105.83,167.905 105.814,167.914 105.802,167.928 105.795,167.945 105.795,167.96 105.841,168.362 107.539,183.44 107.543,183.453 107.541,186.948 107.536,186.965 107.539,186.985 107.541,186.999 107.542,187.012 107.543,187.034 107.539,187.082 107.507,187.173 107.447,187.248 107.366,187.298 107.273,187.32 107.178,187.309 107.091,187.268 107.023,187.2 106.999,187.157 107.001,187.143 106.997,187.126 105.62,183.802 105.611,183.788 101.412,169.217 101.304,168.843 101.292,168.828 101.274,168.818 101.245,168.818 100.494,169.035 99.02,169.55 97.577,170.148 96.17,170.826 95.48,171.207 95.464,171.228 95.46,171.241 95.461,171.257 95.466,171.272 95.662,171.625 103.01,184.917 103.848,186.954 103.852,186.971 104.349,188.169 104.357,188.182 104.371,188.206 104.38,188.226 104.385,188.239 104.393,188.266 104.399,188.293 104.402,188.321 104.402,188.335 104.39,188.416 104.302,188.552 104.154,188.619 103.994,188.594 103.922,188.537 103.911,188.52 101.367,185.976 101.353,185.966 91.899,174.112 91.655,173.807 91.638,173.797 91.618,173.795 91.591,173.806 90.98,174.293 89.815,175.334 88.711,176.439 87.67,177.603 87.177,178.222 87.171,178.241 87.173,178.261 87.191,178.285 87.505,178.535 99.368,187.997 99.382,188.005 100.936,189.565 100.946,189.58 101.864,190.496 101.877,190.505 101.899,190.522 101.914,190.537 101.933,190.558 101.964,190.604 101.986,190.656 101.996,190.711 101.998,190.739 101.99,190.807 101.928,190.927 101.818,191.005 101.684,191.024 101.61,190.999 101.593,190.988 98.267,189.61 98.253,189.607 84.985,182.276 84.64,182.085 84.62,182.083 84.601,182.088 84.58,182.109 84.202,182.793 83.525,184.2 82.927,185.643 82.411,187.118 82.192,187.878 82.194,187.898 82.204,187.915 82.23,187.931 82.613,188.041 97.198,192.244 97.212,192.245 99.245,193.093 99.26,193.102 100.461,193.598 100.474,193.601 100.487,193.604 100.5,193.608 100.521,193.616 100.558,193.635 100.623,193.688 100.669,193.758 100.694,193.838 100.697,193.88 100.692,193.934 100.652,194.034 100.578,194.112 100.48,194.158 100.416,194.159 100.396,194.155 96.797,194.155 96.782,194.158 81.719,192.462 81.327,192.417 81.307,192.423 81.292,192.435 81.281,192.463 81.193,193.239 81.106,194.799 81.106,196.361 81.193,197.92 81.282,198.706 81.29,198.722 81.304,198.734 81.322,198.741 81.337,198.741 81.733,198.696 96.816,196.998 96.83,196.994 98.759,196.999 98.776,197.001 100.349,197 100.362,196.998 100.375,196.996 100.389,196.994 100.411,196.994 100.467,196.999 100.57,197.042 100.649,197.121 100.691,197.224 100.697,197.28 100.694,197.32 100.672,197.397 100.629,197.464 100.57,197.518 100.523,197.536 100.503,197.54 97.179,198.916 97.165,198.925 82.599,203.122 82.22,203.231 82.204,203.244 82.194,203.262 82.195,203.291 82.411,204.042 82.927,205.516 83.525,206.959 84.202,208.366 84.583,209.056 84.604,209.072 84.617,209.076 84.634,209.075 84.649,209.07 84.998,208.877 98.294,201.527 100.33,200.688 100.348,200.684 101.545,200.187 101.558,200.179 101.582,200.166 101.603,200.156 101.67,200.138 101.808,200.152 101.924,200.229 101.989,200.351 101.998,200.421 101.997,200.447 101.987,200.498 101.969,200.547 101.942,200.591 101.913,200.614 101.896,200.626 99.352,203.169 99.343,203.183 87.491,212.635 87.183,212.881 87.173,212.898 87.171,212.918 87.183,212.945 87.67,213.556 88.711,214.721 89.815,215.825 90.98,216.866 91.598,217.359 91.618,217.365 91.637,217.363 91.661,217.345 91.91,217.033 101.373,205.169 101.381,205.155 102.942,203.6 102.956,203.59 103.872,202.673 103.882,202.66 103.899,202.638 103.914,202.622 103.981,202.572 104.144,202.54 104.297,202.604 104.39,202.742 104.402,202.837 104.4,202.861 104.396,202.884 104.39,202.908 104.376,202.926 104.364,202.944 102.987,206.269 102.984,206.284 95.652,219.551 95.461,219.896 95.459,219.916 95.465,219.935 95.486,219.956 96.169,220.334 97.577,221.011 99.02,221.609 100.494,222.125 101.254,222.344 101.274,222.342 101.292,222.332 101.307,222.306 101.418,221.924 105.62,207.339 105.622,207.325 106.469,205.292 106.478,205.277 106.974,204.076 106.977,204.063 106.981,204.05 106.985,204.037 106.992,204.016 107.015,203.973 107.079,203.902 107.162,203.856 107.257,203.84 107.351,203.856 107.435,203.902 107.499,203.974 107.536,204.062 107.536,204.12 107.532,204.14 107.532,207.74 107.535,207.755 105.838,222.817 105.794,223.209 105.799,223.229 105.812,223.244 105.839,223.255 106.616,223.343 108.175,223.43 109.737,223.43 111.297,223.343 112.082,223.254 112.098,223.246 112.111,223.232 112.117,223.214 112.117,223.199 112.073,222.803 110.374,207.72 110.37,207.707 110.375,205.504 110.378,205.487 110.377,204.188 110.374,204.175 110.372,204.161 110.371,204.148 110.37,204.126 110.374,204.078 110.406,203.987 110.466,203.912 110.547,203.862 110.64,203.84 110.736,203.851 110.822,203.892 110.89,203.96 110.912,204.014 110.916,204.034 112.293,207.357 112.302,207.372 116.499,221.937 116.608,222.316 116.62,222.332 116.638,222.342 116.668,222.341 117.418,222.125 118.892,221.609 120.336,221.011 121.743,220.334 122.432,219.953 122.449,219.932 122.452,219.912 ; 156.329,197.001 136.77,197.001 136.759,197.213 136.731,197.636 136.697,198.058 136.656,198.48 136.632,198.69 136.624,198.721 136.607,198.736 136.587,198.742 136.194,198.698 121.131,197.002 121.116,197.005 117.517,197.005 117.497,197.001 117.439,197.001 117.35,197.038 117.279,197.102 117.232,197.185 117.216,197.28 117.232,197.374 117.279,197.458 117.35,197.522 117.393,197.544 117.413,197.552 117.426,197.556 117.44,197.559 117.452,197.562 118.653,198.058 118.668,198.067 120.701,198.915 120.715,198.916 135.296,203.118 135.683,203.229 135.704,203.24 135.714,203.254 135.72,203.269 135.719,203.283 135.501,204.042 134.985,205.516 134.388,206.959 133.71,208.367 133.332,209.05 133.312,209.071 133.292,209.077 133.273,209.075 132.929,208.885 119.66,201.553 119.646,201.55 116.32,200.172 116.303,200.161 116.249,200.139 116.153,200.139 116.063,200.17 115.988,200.23 115.937,200.311 115.916,200.405 115.926,200.5 115.968,200.586 115.999,200.623 116.014,200.638 116.036,200.655 116.049,200.664 116.967,201.58 116.977,201.595 118.531,203.155 118.545,203.163 130.41,212.626 130.721,212.875 130.738,212.897 130.74,212.914 130.736,212.935 130.242,213.556 129.202,214.721 128.097,215.825 126.932,216.866 126.322,217.353 126.295,217.365 126.275,217.363 126.257,217.353 126.011,217.044 116.56,205.194 116.546,205.184 114.002,202.64 113.991,202.623 113.949,202.582 113.861,202.546 113.765,202.541 113.673,202.567 113.595,202.622 113.54,202.7 113.513,202.792 113.518,202.888 113.533,202.934 113.542,202.954 113.556,202.978 113.564,202.991 114.061,204.189 114.065,204.206 114.903,206.243 122.254,219.538 122.446,219.887 122.452,219.912 ; 102.241,196.943 102.241,196.944 102.241,196.947 102.241,196.949 102.242,196.952 102.242,196.953 102.308,197.281 102.504,197.92 102.761,198.537 103.078,199.127 103.45,199.683 103.874,200.199 104.347,200.673 104.863,201.097 105.419,201.47 106.008,201.786 106.625,202.044 107.264,202.241 107.592,202.307 107.604,202.308 ; 102.241,196.943 102.241,196.943 ; 102.241,196.943 102.241,196.852 102.309,196.683 102.435,196.551 102.6,196.476 102.782,196.468 102.954,196.528 103.092,196.647 103.174,196.81 103.183,196.9 ; 103.183,196.9 103.183,196.9 ; 103.183,196.9 104.663,196.899 104.67,196.899 104.684,196.903 104.697,196.912 104.706,196.923 104.709,196.93 ; 103.859,192.415 104.049,192.127 104.477,191.588 104.964,191.1 105.504,190.672 105.791,190.482 106.889,191.575 107.586,191.286 107.585,189.757 107.607,189.757 107.69,189.755 107.841,189.687 107.956,189.566 108.016,189.412 108.013,189.246 107.948,189.094 107.829,188.978 107.676,188.915 107.593,188.915 107.268,188.981 106.633,189.175 106.02,189.431 105.435,189.744 104.883,190.114 104.37,190.535 103.901,191.004 103.479,191.517 103.109,192.068 102.795,192.653 102.539,193.266 102.344,193.9 102.278,194.226 102.281,194.308 102.349,194.46 102.469,194.574 102.624,194.634 102.789,194.631 102.942,194.566 103.058,194.448 103.121,194.294 103.121,194.211 103.106,194.211 104.662,194.21 104.952,193.512 103.841,192.404 103.859,192.415 ; 103.859,192.415 103.859,192.415 ; 104.709,196.93 104.998,197.628 104.999,197.63 105,197.635 105.001,197.64 105.002,197.645 105.002,197.647 ; 104.709,196.93 104.709,196.93 ; 104.987,197.683 104.991,197.679 104.996,197.671 105,197.662 105.002,197.652 105.002,197.647 ; 104.987,197.683 104.987,197.683 ; 104.987,197.683 103.922,198.75 104.107,199.027 104.522,199.546 104.992,200.016 105.512,200.431 105.788,200.616 ; 105.002,197.647 105.002,197.647 ; 105.788,200.616 105.788,200.616 ; 105.788,200.616 106.853,199.549 106.858,199.543 106.872,199.536 106.886,199.534 106.901,199.535 106.908,199.538 ; 106.908,199.538 106.908,199.538 ; 106.908,199.538 107.605,199.827 107.612,199.83 107.624,199.839 107.632,199.852 107.637,199.866 107.637,199.873 ; 107.228,196.585 107.221,196.575 107.234,196.597 ; 107.228,196.585 107.234,196.597 ; 107.228,196.585 107.185,196.509 107.027,196.385 106.832,196.332 106.633,196.358 106.459,196.459 106.337,196.62 106.288,196.816 106.318,197.015 106.371,197.101 106.503,197.326 106.841,197.723 107.243,198.056 107.696,198.315 108.187,198.491 108.701,198.58 109.222,198.58 109.736,198.489 110.226,198.311 110.678,198.05 111.079,197.716 111.416,197.318 111.534,197.115 ; 107.228,196.585 107.315,196.723 107.539,196.991 107.807,197.216 108.109,197.392 108.438,197.512 108.783,197.572 109.133,197.572 109.477,197.511 109.806,197.39 110.108,197.215 110.375,196.989 110.599,196.72 110.693,196.572 110.693,196.573 110.748,196.487 110.914,196.372 111.113,196.33 111.312,196.369 111.48,196.483 111.59,196.653 111.626,196.852 111.581,197.05 111.534,197.115 ; 107.234,196.597 107.234,196.597 ; 107.604,202.308 107.695,202.305 107.863,202.23 107.991,202.099 108.059,201.928 108.059,201.837 108.059,201.749 107.997,201.586 107.88,201.456 107.725,201.377 107.638,201.368 107.637,199.873 ; 107.604,202.308 107.604,202.308 ; 107.637,199.873 107.637,199.873 ; 110.305,201.402 110.222,201.405 110.071,201.473 109.957,201.593 109.897,201.748 109.899,201.913 109.965,202.066 110.083,202.182 110.236,202.245 110.319,202.245 110.645,202.179 111.279,201.984 111.892,201.729 112.477,201.415 113.029,201.046 113.542,200.625 114.012,200.155 114.433,199.643 114.803,199.091 115.117,198.506 115.373,197.894 115.568,197.259 115.634,196.934 115.631,196.851 115.563,196.7 115.443,196.586 115.289,196.526 115.123,196.528 114.971,196.594 114.854,196.712 114.792,196.865 114.792,196.948 114.806,196.948 113.25,196.95 112.961,197.647 114.071,198.755 114.054,198.745 113.863,199.032 113.435,199.572 112.948,200.059 112.408,200.487 112.121,200.677 112.125,200.684 111.024,199.584 110.326,199.873 110.327,201.402 110.305,201.402 ; 110.305,201.402 110.305,201.402 ; 110.311,188.902 110.228,188.905 110.077,188.973 109.962,189.093 109.902,189.247 109.905,189.413 109.971,189.566 110.089,189.682 110.242,189.745 110.325,189.745 110.325,189.73 110.326,191.286 111.024,191.575 112.132,190.465 112.121,190.483 112.409,190.673 112.949,191.101 113.436,191.588 113.864,192.128 114.054,192.415 ; 110.311,188.902 110.311,188.902 ; 110.311,188.902 110.636,188.968 111.271,189.163 111.883,189.419 112.468,189.733 113.019,190.103 113.532,190.525 114.001,190.994 114.423,191.507 114.792,192.059 115.106,192.644 115.361,193.257 115.556,193.892 115.621,194.217 115.621,194.3 115.559,194.453 115.442,194.571 115.29,194.637 115.124,194.64 114.97,194.579 114.85,194.465 114.782,194.314 114.779,194.231 114.779,194.209 113.25,194.21 112.961,193.512 114.061,192.411 114.054,192.415 ; 110.635,194.588 110.635,194.588 ; 110.635,194.588 110.635,194.588 ; 110.635,194.588 110.635,194.588 ; 110.635,194.588 110.635,194.588 ; 110.635,194.588 110.635,194.588 ; 110.635,194.588 110.635,194.588 ; 110.635,194.588 110.635,194.588 ; 110.635,194.588 110.635,194.588 ; 110.635,194.588 110.635,194.588 ; 110.635,194.588 110.542,194.446 110.322,194.188 110.06,193.973 109.766,193.806 109.446,193.693 109.112,193.637 108.773,193.639 108.44,193.7 108.122,193.818 107.829,193.989 107.571,194.209 107.354,194.469 107.264,194.613 107.263,194.614 107.262,194.616 107.261,194.618 107.259,194.619 107.258,194.62 107.221,194.678 107.12,194.771 106.999,194.836 106.866,194.87 106.797,194.87 106.724,194.87 106.582,194.831 106.455,194.756 106.352,194.651 106.28,194.522 106.245,194.379 106.249,194.231 106.292,194.09 106.331,194.028 106.465,193.8 106.809,193.398 107.217,193.061 107.676,192.799 108.174,192.62 108.695,192.529 109.224,192.53 109.745,192.621 110.243,192.801 110.702,193.064 111.109,193.402 111.452,193.805 111.586,194.033 111.624,194.096 111.665,194.237 111.667,194.383 111.631,194.525 111.559,194.653 111.457,194.758 111.33,194.832 111.189,194.87 111.115,194.87 ; 110.635,194.588 110.635,194.588 ; 110.635,194.589 110.635,194.589 ; 110.635,194.588 110.635,194.589 ; 110.635,194.588 110.671,194.652 110.774,194.757 110.9,194.831 111.042,194.87 111.115,194.87 ; 110.635,194.588 110.635,194.589 ; 110.635,194.589 110.635,194.589 ; 110.635,194.588 110.635,194.588 ; 110.635,194.588 110.635,194.588 ; 110.635,194.588 110.635,194.588 ; 110.635,194.588 110.635,194.588 ; 110.635,194.588 110.635,194.588 ; 110.635,194.588 110.635,194.588 ; 110.635,194.588 110.635,194.588 ; 110.635,194.588 110.635,194.588 ; 111.115,194.87 111.115,194.87 ; 111.522,197.132 111.522,197.132 ; 111.522,197.132 111.547,197.093 111.534,197.115 ; 111.522,197.132 111.534,197.115 ; 111.522,197.132 111.522,197.132 ; 111.522,197.132 111.522,197.132 ; 114.054,192.415 114.054,192.415 ; 122.452,219.912 122.452,219.912 ; 122.452,219.912 122.452,219.912 ; 122.452,219.912 122.45,219.896 122.452,219.912

## Silkscreen, mask and mechanical layers (free items; w line width, h text height)
Mechanical 1:
  drawing of 219 lines, arcs and shapes, not listed
Mechanical 11:
  drawing of 217 lines, arcs and shapes, not listed
  text "BOTTOM 3M TAPE" at 135.636,209.931 h1.52